# EAGLE board ATTiny Fuse Reset with 12V Charge Pump_2271-94sa_2472-29sa (EAGLE 6.0)
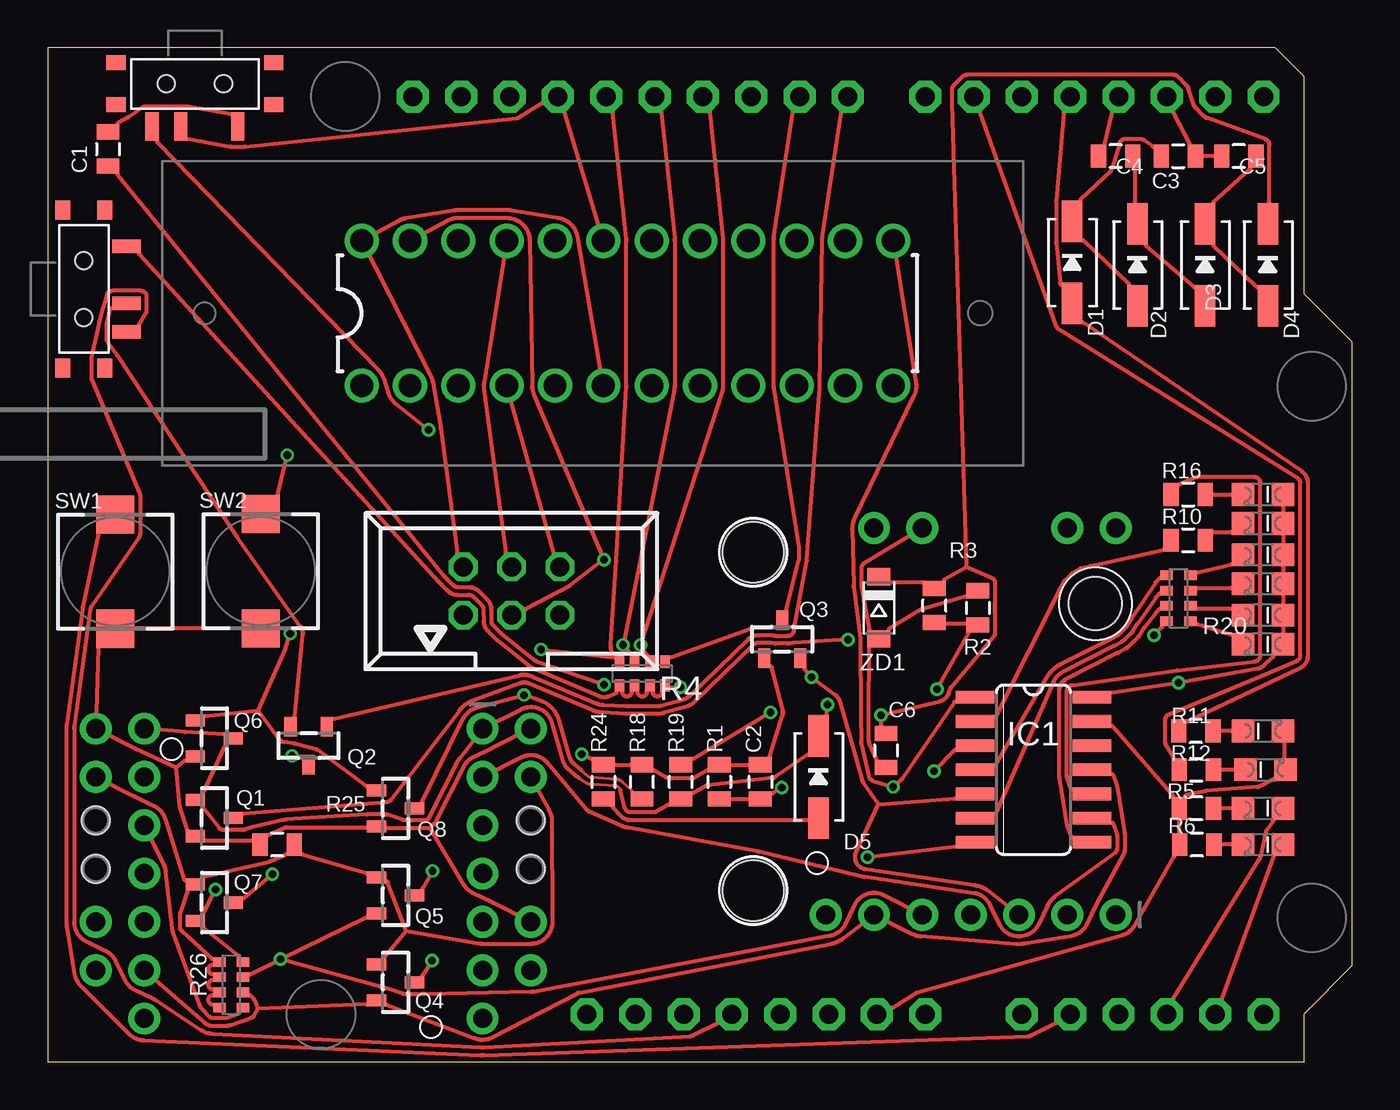
[diagram p0: board, top side]
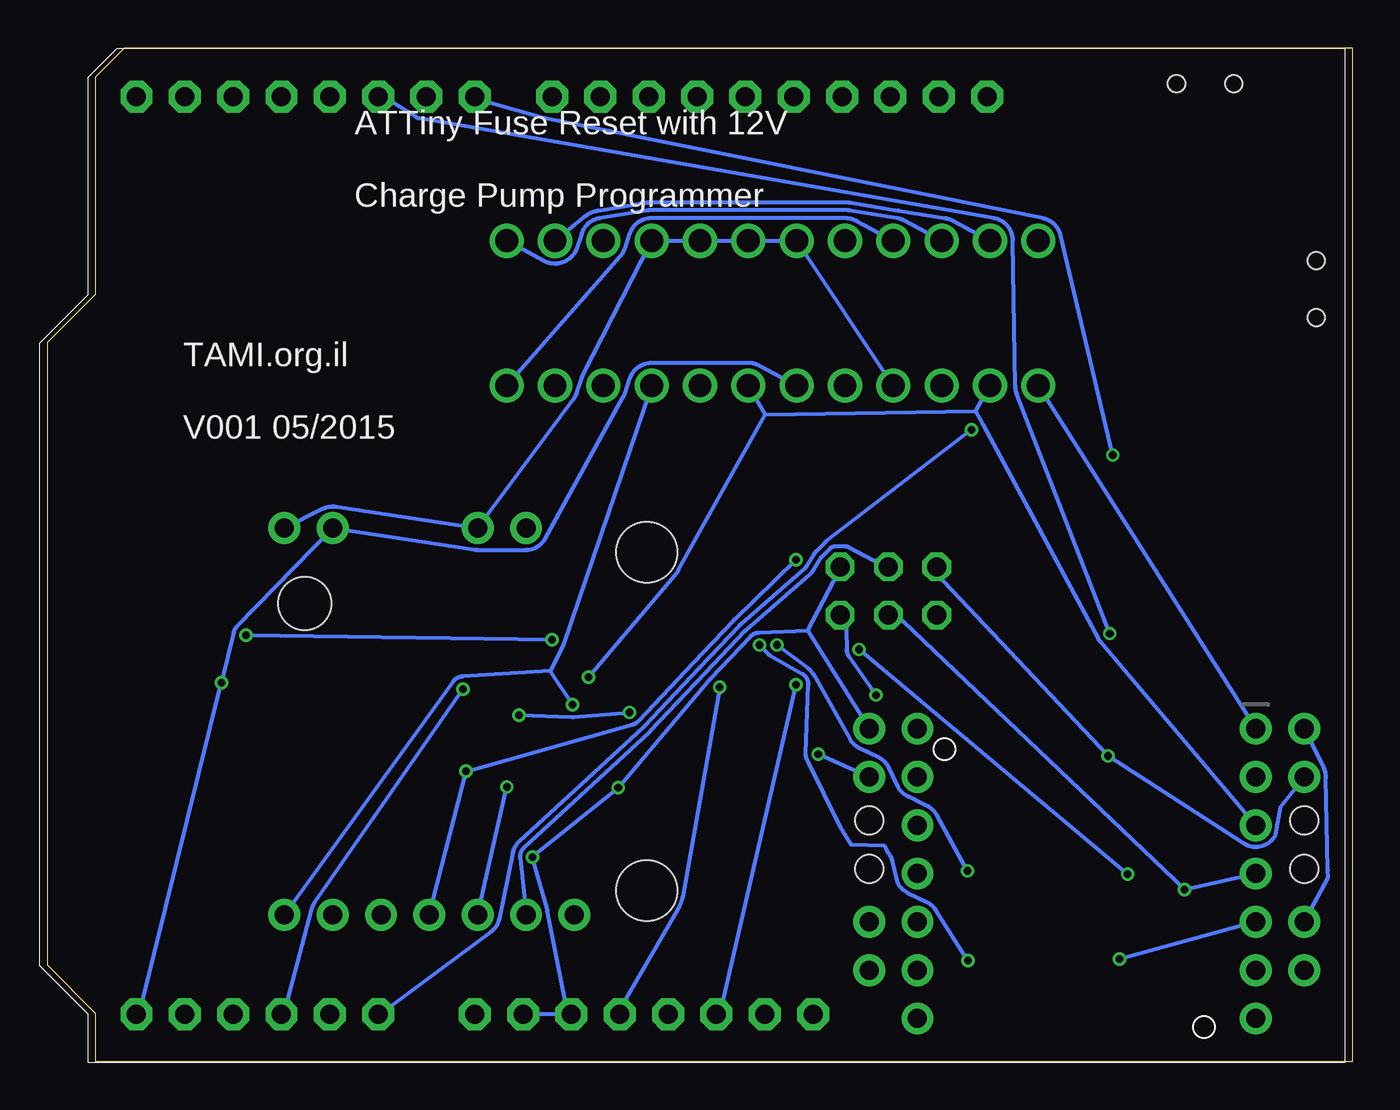
[diagram p1: board, bottom side, seen from below]

Size 68.58 x 53.34 mm. Coordinates in mm from the lower left corner, seen from the top.
Outline: 0,53.34 0,0 66.04,0 66.04,2.54 68.58,5.08 68.58,37.85 66.04,40.39 66.04,51.82 64.52,53.34 0,53.34
Copper layers 1+16: TOP 0.035mm / dielectric 0.15mm / BOTTOM 0.035mm
Design rules: minimum track width 0.1524mm, track to track 0.1524mm, copper to edge 0.254mm, minimum pad ring 0.1mm, minimum via ring 0.1mm
Net classes: 0 default: width 0.152 mm, clearance 0.205 mm
tRestrict: area 34.8,24.4 to 39.4,29; area 35.1,7 to 39,11; area 1.6,11.7 to 3.5,13.7; area 1.6,9.2 to 3.4,11.1; area 24.4,11.6 to 26.4,13.7; area 24.4,9.1 to 26.4,11.2; area 53.2,22.2 to 57,26
vRestrict: area 34.8,24.4 to 39.4,29; area 35.1,7 to 39,11; area 1.6,11.7 to 3.5,13.7; area 1.6,9.2 to 3.4,11.1; area 24.4,11.6 to 26.4,13.7; area 24.4,9.1 to 26.4,11.2; area 53.2,22.2 to 57,26

## Footprints (pad centres in the part's own frame; a part is rotated, then mirrored left to right if it is on the bottom)
BREAKOUT_TAMI_NOHOLES = drill 1 pad 1.676: 1.PB5 -10.16,-8.89; 2.PB4 -10.16,-6.35; 3.PB3 -10.16,-3.81; 4.PB2 -10.16,-1.27; 5.PB1 -10.16,1.27; 6.PB0 -10.16,3.81; 7.GND -10.16,6.35; 8.GND 10.16,-8.89; 9.VCC 10.16,-6.35; 10.GND 10.16,1.27; 11.BAT 10.16,3.81
BREAKOUT_ATTAMI = drill 1 pad 1.676: 1.PB5 1.27,1.27; 2.PB4 1.27,3.81; 3.PB3 1.27,6.35; 4.PB2 1.27,8.89; 5.PB1 1.27,11.43; 6.PB0 1.27,13.97; 7.GND 1.27,16.51; 8.GND 21.59,1.27; 9.VCC 21.59,3.81; 10.GND 21.59,11.43; 11.BAT 21.59,13.97 | hole 2.8: 17.628,2.337 | hole 3.2: 20.32,20.32; 2.54,20.32
0805 = smd 0.8 x 1.2: 1 -0.9,0; 2 0.9,0
SOD-323 = smd 2.184 x 1.067: AQ 2.159,0; CQ -2.159,0
LED-805 = smd 1.2 x 1.2: A 0,-1.05; C 0,1.05
SO14 = smd 0.66 x 2.032: 1 -3.81,-3.073; 2 -2.54,-3.073; 3 -1.27,-3.073; 4 0,-3.073; 5 1.27,-3.073; 6 2.54,-3.073; 7 3.81,-3.073; 8 3.81,3.073; 9 2.54,3.073; 10 1.27,3.073; 11 0,3.073; 12 -1.27,3.073; 13 -2.54,3.073; 14 -3.81,3.073
1X02_PP_HOLES_ONLY = drill 0.889 pad 1.397: 1 0,0; 2 2.54,0 | hole 1.473: 2.54,0; 0,0
SOT23-R = smd 0.635 x 1.016: 1 -0.95,-1; 2 0.95,-1; 3 0,1
0603-ARV = smd 0.5 x 0.65: 1 -1.2,-0.625; 2 -0.4,-0.625; 3 0.4,-0.625; 4 1.2,-0.625; 5 1.2,0.625; 6 0.4,0.625; 7 -0.4,0.625; 8 -1.2,0.625
PUSHBUTTON_SMD_SJ = smd 2 x 2: P$1 3,0; P$2 -3,0
KPS-1290 = smd 0.7 x 1.5: O -2.25,2.25; P 0.75,2.25; S 2.25,2.25 | smd 1 x 0.8: P$1 -4.15,1.1; P$2 -4.15,-1.1; P$3 4.15,-1.1; P$4 4.15,1.1 | hole 0.9: 1.5,0; -1.5,0
ARDUINOR3-BPLACE = drill 1 pad 1.676 octagon: 3V 35.56,2.54; 5V 38.1,2.54; A0 50.8,2.54; A1 53.34,2.54; A2 55.88,2.54; A3 58.42,2.54; A4 60.96,2.54; A5 63.5,2.54; AREF 23.876,50.8; D0 63.5,50.8; D1 60.96,50.8; D2 58.42,50.8; D3 55.88,50.8; D4 53.34,50.8; D5 50.8,50.8; D6 48.26,50.8; D7 45.72,50.8; D8 41.656,50.8; D9 39.116,50.8; D10 36.576,50.8; D11 34.036,50.8; D12 31.496,50.8; D13 28.956,50.8; GND 26.416,50.8; GND1 43.18,2.54; GND2 40.64,2.54; IOREF 30.48,2.54; RESERVED 27.94,2.54; RESET 33.02,2.54; SCL 18.796,50.8; SDA 21.336,50.8; VIN 45.72,2.54
DIL-24-ZIF = drill 1.2 pad 1.8: P$1 -13.97,-3.81; P$2 -11.43,-3.81; P$3 -8.89,-3.81; P$4 -6.35,-3.81; P$5 -3.81,-3.81; P$6 -1.27,-3.81; P$7 1.27,-3.81; P$8 3.81,-3.81; P$9 6.35,-3.81; P$10 8.89,-3.81; P$11 11.43,-3.81; P$12 13.97,-3.81; P$13 13.97,3.81; P$14 11.43,3.81; P$15 8.89,3.81; P$16 6.35,3.81; P$17 3.81,3.81; P$18 1.27,3.81; P$19 -1.27,3.81; P$20 -3.81,3.81; P$21 -6.35,3.81; P$22 -8.89,3.81; P$23 -11.43,3.81; P$24 -13.97,3.81
057-006-1 = drill 1 pad 1.508 octagon: 1 -2.54,-1.27; 2 -2.54,1.27; 3 0,-1.27; 4 0,1.27; 5 2.54,-1.27; 6 2.54,1.27
SOD-123 = smd 0.91 x 1.22: A 1.635,0; C -1.635,0

## Placement (x,y rotation side)
A1  [BREAKOUT_TAMI_NOHOLES]  12.7,8.64 180 top
A2  [BREAKOUT_ATTAMI]  57.4,6.48 90 top
A3  [BREAKOUT_TAMI_NOHOLES]  15.24,8.64 180 bottom
C1  [0805]  3.17,48.01 270 top
C2  [0805]  37.47,14.73 270 top
C3  [0805]  59.44,47.62 0 top
C4  [0805]  56.13,47.62 180 top
C5  [0805]  62.61,47.62 180 top
C6  [0805]  44.07,16.38 270 top
D1  [SOD-323]  53.85,42.04 270 top
D2  [SOD-323]  57.28,41.91 270 top
D3  [SOD-323]  60.83,41.91 270 top
D4  1N4148  [SOD-323]  64.14,41.91 270 top
D5  [SOD-323]  40.51,14.99 270 top
HBEAT  H.B.  [LED-805]  64.01,15.37 270 top
HV_O  HV  [LED-805]  63.88,17.4 270 top
IC1  [SO14]  51.82,15.37 270 top
ISP  PMD  [LED-805]  63.88,13.34 90 top
ISP_ERR  ERR  [LED-805]  63.88,11.43 90 top
JP1  [1X02_PP_HOLES_ONLY]  25.4,10.16 90 top
JP2  [1X02_PP_HOLES_ONLY]  2.54,10.16 90 top
PB0  PB0  [LED-805]  63.88,29.84 90 top
PB1  PB1  [LED-805]  63.88,28.32 90 top
PB2  PB2  [LED-805]  63.88,26.67 90 top
PB3  PB3  [LED-805]  63.88,25.15 90 top
PB4  PB4  [LED-805]  63.88,23.5 90 top
PB5  PB5  [LED-805]  63.88,21.97 90 top
Q1  [SOT23-R]  8.76,12.83 270 top
Q2  [SOT23-R]  13.72,16.64 180 top
Q3  [SOT23-R]  38.61,22.23 0 top
Q4  [SOT23-R]  18.29,4.19 270 top
Q5  [SOT23-R]  18.29,8.76 270 top
Q6  [SOT23-R]  8.76,17.02 270 top
Q7  [SOT23-R]  8.76,8.38 270 top
Q8  [SOT23-R]  18.29,13.34 270 top
R1  [0805]  35.31,14.73 270 top
R2  [0805]  48.9,23.88 270 top
R3  [0805]  46.61,24 90 top
R4  [0603-ARV]  31.25,20.42 180 top
R5  [0805]  60.38,13.34 180 top
R6  [0805]  60.4,11.43 180 top
R10  [0805]  59.94,27.43 0 top
R11  [0805]  60.35,17.4 180 top
R12  [0805]  60.38,15.37 0 top
R16  [0805]  59.94,29.84 0 top
R18  [0805]  31.24,14.73 90 top
R19  [0805]  33.27,14.73 90 top
R20  [0603-ARV]  59.44,24.38 90 top
R24  [0805]  29.21,14.73 270 top
R25  [0805]  12.06,11.43 180 top
R26  [0603-ARV]  9.65,4.06 90 top
SW1  [PUSHBUTTON_SMD_SJ]  3.56,25.78 270 top
SW2  [PUSHBUTTON_SMD_SJ]  11.2,25.81 270 top
SW3  [KPS-1290]  7.75,51.44 180 top
SW4  SWITCH_SPDT  [KPS-1290]  1.91,40.64 270 top
U1  [ARDUINOR3-BPLACE]  0.41,-0.03 0 top
U$2  [DIL-24-ZIF]  30.48,39.37 0 top
X1  [057-006-1]  24.38,24.77 0 top
ZD1  [SOD-123]  43.69,23.88 270 top

## Library data of the parts
A1-A3 C1-C6 D1-D5 HBEAT HV_O ISP ISP_ERR PB0 PB1-PB5 R1-R3 R5 R6 R10-R12 R16 R18 R19 R24 R25 U1 = ATtami
IC1 = 74xx-eu
JP1 JP2 = SparkFun-Connectors
Q1-Q8 SW1 SW2 = microbuilder
R4 R20 R26 = SparkFun-Passives
SW3 SW4 = SparkFun-Electromechanical
U$2 = ATTiny Fuse Reset with 12V Charge Pump
X1 = con-panduit; OC_FARNELL: unknown; OC_NEWARK: unknown
ZD1 = dp_devices

## Nets
11.5V: C6.1 D4.CQ R3.2 R19.2 ZD1.C
ATTINY_VCC: A1.9.VCC A2.9.VCC A3.9.VCC C2.1 IC1.14 PB0.A PB1.A PB2.A PB3.A PB4.A PB5.A Q2.3 Q3.1 Q4.1 Q5.1 Q7.1 R1.1 R18.2 R24.1 R25.1 R26.5 R26.6 R26.7 R26.8 U1.A5 U$2.P$6 U$2.P$24 X1.2
GND: A1.8.GND A1.10.GND A2.8.GND A2.10.GND A3.8.GND A3.10.GND C2.2 C6.2 HBEAT.C HV_O.C IC1.7 IC1.13 Q1.2 Q6.2 Q8.2 R1.2 R2.1 R5.2 R6.2 R25.2 SW1.P$1 SW2.P$1 SW3.P U1.GND U1.GND1 U1.GND2 U$2.P$4 U$2.P$16 U$2.P$17 U$2.P$18 U$2.P$19 X1.6 ZD1.A
HV/RESET: A1.1.PB5 A2.1.PB5 A3.1.PB5 D5.CQ Q1.1 Q6.3 R19.1 U$2.P$1 U$2.P$9
HV_OFF(RESET): Q6.1 Q8.1 U1.D5
HV_SENSE: R2.2 R3.1 U1.A2
ISP_RESET: Q8.3 R18.1 X1.5
N$1: Q2.2 SW4.P
N$2: Q3.3 R4.1 U1.D9
N$3: SW3.S U1.A0
N$4: HV_O.A R11.1
N$5: D5.AQ R24.2
N$6: ISP.C R5.1
N$7: A1.2.PB4 IC1.9
N$8: Q4.3 R4.2 U1.D11
N$9: SW1.P$2 U1.A1
N$10: C3.1 D1.CQ D2.AQ
N$11: C4.1 D2.CQ D3.AQ
N$12: C5.1 D3.CQ D4.AQ
N$13: IC1.10 R16.1
N$14: C1.1 SW3.O
N$15: ISP_ERR.C R6.1
N$16: SW4.S U1.3V
N$17: ISP_ERR.A U1.A4
N$18: ISP.A U1.A3
N$19: R12.1 U1.D6
N$20: HBEAT.A R12.2
N$21: IC1.2 R10.1
N$22: SW2.P$2 U1.D7
N$23: PB2.C R20.4
N$24: IC1.4 R20.5
N$25: PB1.C R10.2
N$26: IC1.6 R20.6
N$27: PB0.C R16.2
N$28: IC1.8 R20.7
N$29: PB3.C R20.3
N$30: PB4.C R20.2
N$31: PB5.C R20.1
N$32: Q1.3 R20.8
N$33: C1.2 U1.RESET
N$34: Q7.3 R4.4 U1.D13
N$36: X1.1
N$37: Q5.3 R4.3 U1.D12
P1: C3.2 C5.2 U1.D2
P2: C4.2 U1.D3
PUMP_VCC: D1.AQ R11.2 U1.D4
SCI: A2.3.PB3 A3.3.PB3 IC1.5 Q3.2 R26.1 U$2.P$2 U$2.P$7
SDI_MOSI: A2.6.PB0 A3.6.PB0 IC1.11 Q4.2 R26.2 U$2.P$12 U$2.P$21 X1.4
SDO-SCK: A2.4.PB2 A3.4.PB2 IC1.3 Q7.2 R26.4 U$2.P$14 U$2.P$23 X1.3
SII-MISO: A2.5.PB1 A3.5.PB1 IC1.1 Q5.2 R26.3 U$2.P$13 U$2.P$22
VCC: R4.5 R4.6 R4.7 R4.8 SW4.O U1.5V
VCC_OFF: Q2.1 U1.D8
VIN: U1.VIN

## Tracks (layer width: path | path; a pad name or v marks a point on that pad's centre or on a via)
11.5V  (via drill 0.4 pad 0.7)
  TOP 0.203: 48.3,26.04 47.16,25.39 arc60 47.11,25.3 47.11,25.2 R3.2 46.11,25.2 46.01,25.2 44.3,25.2 44.2,25.2 ZD1.C | C6.1 43.8,17.58 43.8,17.68 v43.8,18.24 46.9,18.97 arc58 47.37,19.4 47.44,19.61 arc-21 47.49,19.7 49.73,22.38 arc40 49.8,22.58 49.8,25.18 arc66 49.62,25.46 48.3,26.04 | D4.CQ 64.22,45.06 64.22,45.16 64.22,48.23 arc70 64.02,48.51 60.92,49.64 arc-25 60.8,49.71 60.31,50.2 arc-27 60.24,50.33 59.96,51.21 arc27 59.88,51.33 59.39,51.82 arc45 59.17,51.91 48.32,51.91 arc45 48.1,51.82 47.61,51.33 arc45 47.52,51.11 47.52,50.42 47.52,50.41 48.3,26.04 | v37.99,18.38 33.93,15.95 arc-31 33.87,15.93 33.77,15.93 R19.2
  BOTTOM 0.203: v43.8,18.24 41.02,18.13 arc-7 40.94,18.14 v37.99,18.38
ATTINY_VCC  (via drill 0.4 pad 0.7)
  TOP 0.203: IC1.14 55.8,19.41 55.91,19.41 arc9 55.92,19.41 v59.45,19.94 63.56,20.67 arc33 63.92,20.85 64.4,21.3 arc47 64.43,21.37 64.43,21.47 PB5.A 64.93,22.47 64.93,22.57 64.93,22.89 64.93,23 PB4.A 64.93,23.99 64.93,24.09 64.93,24.55 64.93,24.65 PB3.A 64.93,25.64 64.93,25.75 64.93,26.07 64.93,26.17 PB2.A 64.93,27.17 64.93,27.27 64.93,27.72 64.93,27.82 PB1.A 64.93,28.82 64.93,28.92 64.93,29.25 64.93,29.35 PB0.A | R26.8 8.8,3.01 8.7,3.01 arc-180 8.7,3.52 8.8,3.52 R26.7 8.8,3.81 8.7,3.81 arc-180 8.7,4.32 8.8,4.32 R26.6 8.8,4.61 8.7,4.61 arc-180 8.7,5.12 8.8,5.12 R26.5 8.8,5.41 8.7,5.41 arc-42 8.63,5.44 7.05,6.89 arc-48 6.95,7.11 6.95,7.75 arc-19 6.96,7.85 7.35,8.98 arc19 7.36,9.01 7.36,9.12 Q7.1 | Q7.1 8.17,9.55 8.17,9.65 arc-77 8.25,9.75 11.63,10.53 arc11 11.69,10.55 12.52,10.92 arc-24 12.56,10.93 12.67,10.93 R25.1 13.26,10.93 13.37,10.93 arc-17 13.39,10.93 16.75,9.93 arc17 16.78,9.93 16.88,9.93 Q5.1 17.69,9.5 17.8,9.5 arc-70 17.89,9.43 18.84,6.88 | Q2.3 13.5,16.04 13.4,16.04 13.39,16.04 v12.85,16.09 | Q4.1 17.69,5.36 17.69,5.46 arc-40 17.72,5.52 18.84,6.88 | X1.2 21.53,26.69 21.53,26.79 20.66,33.33 arc2 20.66,33.35 20.24,35.77 arc17 20.12,36.11 U$2.P$24 18.48,44.24 arc-19 18.86,44.37 21.33,44.77 arc-9 21.59,44.8 24.13,44.8 arc-9 24.39,44.77 26.86,44.37 arc-71 27.86,43.38 U$2.P$6 | v28.08,16.19 28.56,15.94 arc27 28.61,15.93 28.71,15.93 R24.1 29.71,15.63 29.81,15.63 30.64,15.63 30.74,15.63 R18.2 31.74,15.33 31.84,15.33 arc-29 31.89,15.32 32.52,14.96 arc29 32.67,14.93 33.87,14.93 arc29 34.02,14.96 34.66,15.32 arc-29 34.71,15.33 34.81,15.33 R1.1 35.8,15.63 35.91,15.63 36.87,15.63 36.97,15.63 C2.1 37.96,15.93 37.96,16.03 arc-17 37.97,16.06 38.62,18.19 arc31 38.63,18.54 38.07,20.74 arc76 37.98,20.82 37.87,20.82 Q3.1
  TOP 0.203: 18.84,6.88 22.67,6.24 arc9 22.86,6.22 25.4,6.22 arc90 26.55,7.37 26.52,12.85 arc22 26.51,12.89 26.44,13.07 | 26.44,13.07 | 26.44,13.07 26.35,13.27 arc7 26.35,13.28 A3.9.VCC | A1.9.VCC 4.57,13.96 arc1 4.58,13.96 5.58,13.48 arc-47 6.17,12.79 7.16,9.62 arc73 7.25,9.55 7.36,9.55 Q7.1
  BOTTOM 0.203: v28.08,16.19 A3.9.VCC | A1.9.VCC 3.78,13.41 4.04,11.96 arc97 5.7,11.48 v12.85,16.09 21.51,25.3 21.59,25.37 X1.2 | U1.A5 63.56,3.24 63.56,3.34 v59.45,19.94 58.8,22.6 arc31 58.63,22.9 A2.9.VCC 46.15,26.93 arc-9 45.97,26.92 43.43,26.92 arc-61 42.43,27.52 38.31,34.98 arc-11 38.23,35.18 37.98,35.94 arc72 36.83,36.77 31.75,36.77 arc28 31.18,36.62 U$2.P$6
GND  (via drill 0.4 pad 0.7)
  TOP 0.203: 6.75,15.5 6.95,13.43 arc13 6.96,13.36 7.35,12.23 arc-19 7.36,12.19 7.36,12.09 Q1.2 8.17,11.66 8.27,11.66 10.77,11.66 10.87,11.66 R25.2 11.46,11.93 11.56,11.93 arc24 11.61,11.94 12.44,12.31 arc-24 12.56,12.34 16.78,12.34 16.88,12.34 Q8.2 17.69,12.3 17.8,12.3 19.8,12.3 arc3 19.84,12.3 20.09,12.32 | 6.75,15.5 4.6,16.48 arc-2 4.56,16.5 A1.8.GND 2.66,21.78 2.66,21.88 SW1.P$1 4.45,22.79 4.56,22.79 10.2,22.79 10.3,22.79 SW2.P$1 | A3.8.GND 23.38,16.5 arc-1 23.36,16.49 22.36,16.02 arc38 21.84,15.5 20.44,12.7 arc-21 20.28,12.49 20.09,12.32 | R1.2 35.8,13.83 35.91,13.83 36.87,13.83 36.97,13.83 C2.2 37.96,14.13 38.06,14.13 arc30 38.12,14.14 v38.59,14.42 | A3.10.GND 23.37,8.39 arc1 23.36,8.39 22.36,8.88 arc-33 21.88,9.32 20.09,12.32 | HV_O.C 65,16.9 65,16.8 65,15.97 65,15.87 HBEAT.C 64.56,14.87 64.46,14.87 arc27 64.41,14.86 63.7,14.49 arc-22 63.58,14.46 60.85,14.24 arc7 60.81,14.24 59.85,14.03 arc78 59.77,13.94 59.77,13.83 R5.2 | R5.2 59.49,12.84 59.49,12.73 59.49,12.03 59.49,11.93 R6.2 59.2,10.93 59.2,10.83 arc-30 59.19,10.78 57.13,7.18 arc-45 56.44,6.64 45.7,3.64 arc17 45.62,3.6 44.42,2.85 44.32,2.85 U1.GND1 | X1.6 26.61,26.69 26.61,26.79 U$2.P$4 | U$2.P$19 27.17,49.93 27.17,50.03 U1.GND 26.09,50.42 25.98,50.42 24.79,49.67 arc-26 24.66,49.62 10.38,48.13 arc-6 10.35,48.13 9.65,48.13 arc-10 9.59,48.13 7.37,48.53 arc10 7.35,48.54 7.25,48.54 SW3.P | IC1.13 55.8,17.68 55.91,17.68 arc-49 55.98,17.64 59.15,14 arc-41 59.18,13.94 59.18,13.83 R5.2 | 6.75,15.5 7.19,15.83 arc-37 7.25,15.85 7.36,15.85 Q6.2 | C6.2 43.57,15.78 43.57,15.88 arc24 43.56,15.93 43.19,16.76 arc-24 43.16,16.88 43.15,18.23 arc-1 43.15,18.24 43.18,21.79 43.18,21.89 ZD1.A
  TOP 0.203: v43.09,10.78 47.72,11.33 arc-7 47.73,11.33 47.83,11.33 IC1.7 | A2.10.GND 42.92,26.23 arc59 42.77,25.97 42.77,25.06 arc10 42.78,25 43.18,22.71 arc-10 43.18,22.7 43.18,22.59 ZD1.A | R2.1 48.4,24.48 48.3,24.48 arc16 48.27,24.47 45.92,23.8 arc15 45.85,23.77 44.24,22.78 arc58 44.2,22.7 44.2,22.59 ZD1.A
  BOTTOM 0.203: A1.10.GND 1.27,9.7 1.29,10.09 1.4,14.96 arc-28 1.52,15.5 A1.8.GND | 28.64,22.68 27.26,25.29 27.25,25.3 27.18,25.37 X1.6 | 28.64,22.68 31.18,22.58 arc-44 31.63,22.38 33.73,20.15 arc-3 33.76,20.13 v38.59,14.42 v43.09,10.78 42.33,8.06 arc4 42.31,7.97 41.39,3.34 41.39,3.24 U1.GND2 41.78,2.5 41.88,2.5 42.75,2.5 42.85,2.5 U1.GND1 | U$2.P$4 U$2.P$19 U$2.P$18 U$2.P$17 U$2.P$16 40.44,36.11 arc-9 40.51,35.94 40.77,35.18 arc18 40.94,34.84 A2.10.GND 53.42,29.2 arc-35 54.11,29.09 A2.8.GND | A3.8.GND 28.64,22.68
HV/RESET  (via drill 0.4 pad 0.7)
  TOP 0.152: 30.11,14.29 30.04,14.39 arc51 29.83,14.51 28.57,14.59 arc-32 28.23,14.71 27.94,14.93
  TOP 0.203: 27.94,14.93 27.8,15.03 arc-6 27.77,15.05 27.38,15.38 arc-34 27.05,15.9 26.5,17.84 arc101 24.88,18.55 A1.1.PB5 21.63,15.94 arc11 21.47,15.68 20.07,12.88 arc-63 19.8,12.71 18.78,12.71 arc-19 18.68,12.73 17.89,12.99 arc19 17.8,13.01 16.78,13.01 arc4 16.76,13.01 12.52,12.74 arc10 12.4,12.73 10.7,12.33 arc6 10.66,12.32 10.37,12.22 arc-19 10.27,12.2 9.26,12.2 arc-53 9.01,12.32 8.19,13.4 arc-37 8.17,13.46 8.17,13.56 Q1.1 8.17,13.99 8.17,14.1 arc-25 8.18,14.14 9.35,16.66 arc25 9.36,16.7 9.36,16.8 Q6.3 9.36,17.23 9.26,17.23 9.25,17.23 7.24,17.34 7.23,17.34 A3.1.PB5 | v40.99,18.79 40.95,18.25 40.95,18.24 40.95,18.14 D5.CQ 40.08,16.15 39.98,16.15 arc35 39.92,16.14 38.24,14.98 arc-28 38.1,14.93 34.67,14.54 arc23 34.55,14.5 33.92,14.14 arc-29 33.87,14.13 33.77,14.13 R19.1 32.78,13.53 32.67,13.53 arc29 32.62,13.52 31.99,13.16 arc-29 31.84,13.12 30.64,13.12 arc-76 30.34,13.36 30.11,14.29
  BOTTOM 0.203: U$2.P$9 41.45,21.99 arc8 41.48,21.91 42.16,20.55 | v40.99,18.79 42.16,20.55 | 42.16,20.55 46.78,20.27 arc-51 47.28,20 A2.1.PB5 | U$2.P$1 A3.1.PB5
HV_OFF(RESET)  (via drill 0.4 pad 0.7)
  TOP 0.203: Q8.1 16.88,14.5 16.78,14.5 arc-37 16.72,14.52 14.22,16.39 arc22 14.11,16.44 13.01,16.73 arc6 12.94,16.74 12.4,16.82 arc-45 12.2,16.95 11.07,18.49 | 11.07,18.49 12.48,21.68 arc6 12.49,21.71 v12.76,22.53 | Q6.1 8.17,18.18 8.27,18.18 arc6 8.28,18.18 11.07,18.49
  BOTTOM 0.203: v12.76,22.53 17.64,35.12 arc20 17.72,35.54 17.84,43.2 arc-79 18.84,44.37 49.07,49.62 arc22 49.18,49.67 50.37,50.42 50.47,50.42 U1.D5
HV_SENSE  (via drill 0.4 pad 0.7)
  TOP 0.203: v46.74,19.61 48.38,22.53 arc29 48.4,22.58 48.4,22.68 R2.2 48.4,23.04 48.3,23.04 47.21,23.04 47.11,23.04 R3.1
  BOTTOM 0.203: U1.A2 55.94,3.24 55.94,3.34 54.7,8.04 arc20 54.53,8.4 v46.74,19.61
ISP_RESET  (via drill 0.4 pad 0.7)
  TOP 0.152: R18.1 30.72,14.16 30.72,14.23 arc47 30.69,14.29 30.24,14.7 arc39 29.85,14.87 28.59,14.95 arc-37 28.43,15.02 28.03,15.36
  TOP 0.203: 28.03,15.36 27.65,15.69 arc-34 27.45,16.01 26.89,17.95 arc55 25.91,18.99 v25.04,19.3 22.56,18.63 arc49 21.83,18.03 19.7,13.7 arc26 19.69,13.65 19.69,13.55 Q8.3
  BOTTOM 0.203: X1.5 26.61,22.84 26.61,22.74 26.58,21.67 arc-34 26.46,21.31 v25.04,19.3
N$1
  TOP 0.203: Q2.2 12.98,18.04 12.98,18.14 arc-6 12.98,18.16 13.41,22.46 arc41 13.29,22.91 9.95,27.63 9.95,27.64 3.66,37.16 arc2 3.65,37.17 3.15,37.86 arc-36 3.1,38.04 3.1,38.74 arc-15 3.11,38.82 3.31,39.57 arc-75 3.4,39.64 3.51,39.64 SW4.P
N$2
  TOP 0.203: U1.D9 39.18,50.03 39.18,49.93 38.18,43.36 arc9 38.16,43.18 38.16,35.56 arc9 38.18,35.37 39.49,27.05 arc-9 39.49,27.04 39.49,26.43 arc-14 39.49,26.41 38.83,23.76 arc14 38.82,23.73 38.82,23.63 Q3.3 38.39,22.86 38.29,22.86 37.34,22.86 arc20 36.96,22.79 32.74,21.28 arc-20 32.7,21.27 32.6,21.27 R4.1
N$3  (via drill 0.4 pad 0.7)
  TOP 0.203: SW3.S 5.75,48.54 5.75,48.44 arc44 5.77,48.36 17.38,36.4 arc-26 17.66,35.94 17.9,35.19 arc33 18.3,34.62 v20.01,33.24
  BOTTOM 0.203: v20.01,33.24 27.67,27.36 arc-7 27.74,27.3 28.18,26.85 arc-14 28.29,26.72 28.68,26.07 arc18 28.81,25.92 32.12,23.04 arc-6 32.23,22.94 34.33,20.72 34.33,20.71 37.22,17.65 arc4 37.27,17.6 43.82,11.56 arc-36 44.14,10.99 44.85,7.52 arc42 45.29,6.83 50.48,2.96 50.55,2.89 U1.A0
N$4
  TOP 0.203: HV_O.A 62.33,17.4 62.23,17.4 61.65,17.4 61.55,17.4 R11.1
N$5
  TOP 0.203: D5.AQ 40.08,12.72 39.98,12.72 30.64,12.72 arc-48 30.11,12.95 29.73,13.36 arc-42 29.71,13.43 29.71,13.53 R24.2
N$6
  TOP 0.203: ISP.C 62.33,13.34 62.23,13.34 61.68,13.34 61.57,13.34 R5.1
N$7
  TOP 0.203: IC1.9 55.8,12.6 55.91,12.6 arc-70 56,12.53 56.19,11.99 arc-20 56.21,11.89 56.21,11.23 arc-54 56.09,10.98 52.92,8.67 arc28 52.56,8.24 52.09,7.25 arc-129 50.02,7.25 49.55,8.24 arc56 48.68,8.88 42.94,9.72 arc-5 42.84,9.74 37.34,11.07 37.33,11.08 30.44,12.33 arc-13 30.19,12.4 28.49,13.15 arc-26 28.38,13.23 26.28,15.72 arc77 24.88,16.01 A1.2.PB4
N$8  (via drill 0.4 pad 0.7)
  TOP 0.203: R4.2 31.5,21.27 31.5,21.37 arc34 31.49,21.43 v31.16,21.93 35.44,35.19 arc18 35.49,35.56 35.5,43.18 arc6 35.49,43.31 34.79,49.93 34.79,50.03 U1.D11 | Q4.3 19.69,4.41 19.69,4.51 arc-33 19.71,4.56 v20.21,5.33
  BOTTOM 0.203: v20.21,5.33 21.89,7.98 arc-32 22.36,8.39 23.36,8.88 arc39 23.89,9.41 24.18,10.62 24.24,10.76 24.43,11.04 24.59,11.35 26.34,11.43 26.69,11.97 26.91,12.36 28.63,15.84 arc35 28.73,16.21 28.59,19.82 arc-63 28.92,20.41 30.58,21.35 arc17 30.73,21.47 v31.16,21.93
N$9
  TOP 0.203: SW1.P$2 2.66,27.88 2.66,27.78 arc-12 2.65,27.76 1.85,23.93 arc4 1.85,23.88 1,17.74 arc8 0.99,17.53 0.99,7.37 arc9 1.01,7.11 1.41,4.64 arc36 1.73,4.02 4.27,1.48 arc42 5.03,1.14 22.77,0.36 arc5 22.93,0.36 51.56,1.36 arc24 51.69,1.39 53.02,2.05 53.09,2.12 U1.A1
N$10
  TOP 0.203: D2.AQ 56.84,40.74 56.84,40.84 arc46 56.81,40.92 54.45,43.18 arc44 54.38,43.2 54.28,43.2 D1.CQ 54.28,45.19 54.28,45.29 arc-47 54.31,45.36 55.84,46.8 arc30 55.93,46.94 56.34,48.31 arc-73 56.63,48.53 57.43,48.53 arc-36 57.61,48.48 58.08,48.14 arc36 58.14,48.12 58.24,48.12 C3.1
N$11
  TOP 0.203: D3.AQ 60.4,40.74 60.3,40.74 arc-41 60.23,40.77 57.74,42.9 arc-49 57.71,42.98 57.71,43.08 D2.CQ 57.16,45.06 57.16,45.16 57.16,47.02 57.16,47.13 C4.1
N$12
  TOP 0.203: D4.AQ 63.7,40.74 63.6,40.74 arc-44 63.53,40.77 61.3,42.9 arc-46 61.27,42.98 61.27,43.08 D3.CQ 61.27,45.06 61.27,45.16 arc-48 61.3,45.24 63.18,46.95 arc48 63.21,47.02 63.21,47.13 C5.1
N$13
  TOP 0.203: IC1.10 53.98,14.33 53.87,14.33 arc-70 53.78,14.39 53.58,14.93 arc-20 53.57,15.04 53.57,19.51 arc-82 53.83,19.81 59.35,20.59 arc-1 59.37,20.59 63.47,21.07 arc83 63.74,21.37 63.74,30.45 arc90 63.43,30.75 60.44,30.75 arc24 60.32,30.73 59.49,30.35 arc-24 59.44,30.34 59.34,30.34 R16.1
N$14
  TOP 0.203: SW3.O 9.75,49.83 9.65,49.83 arc-10 9.63,49.84 7.4,50.24 arc10 7.35,50.24 5.15,50.24 arc36 4.97,50.19 4.28,49.69 arc-8 4.24,49.66 3.73,49.4 arc62 3.67,49.31 3.67,49.2 C1.1
N$15
  TOP 0.203: ISP_ERR.C 62.33,11.43 62.23,11.43 61.7,11.43 61.6,11.43 R6.1
N$16
  TOP 0.203: SW4.S 4.8,38.64 4.8,38.74 arc-31 4.82,38.79 5.17,39.38 arc31 5.21,39.54 5.21,40.24 arc90 4.91,40.55 3.4,40.55 arc73 3.11,40.33 2.92,39.69 arc2 2.91,39.67 2.71,38.92 arc3 2.71,38.89 2.31,37.05 arc12 2.3,36.99 2.3,35.99 arc23 2.32,35.87 4.84,29.9 arc-23 4.86,29.78 4.86,27.78 arc-34 4.81,27.61 2.3,23.95 arc27 2.25,23.82 1.41,17.68 arc8 1.4,17.53 1.4,7.37 arc64 2.04,6.33 3.04,5.86 arc-39 3.57,5.32 4.05,4.33 arc39 4.58,3.79 5.58,3.32 arc-8 5.71,3.24 8.08,1.68 arc30 8.64,1.49 22.78,0.77 arc6 22.94,0.77 33.79,1.36 arc23 33.91,1.39 35.24,2.05 35.31,2.12 U1.3V
N$17
  TOP 0.203: ISP_ERR.A 64.43,10.93 64.43,10.83 arc-20 64.43,10.79 61.71,3.34 61.71,3.24 U1.A4
N$18
  TOP 0.203: ISP.A 64.43,12.84 64.43,12.73 arc-35 64.41,12.68 64.08,12.21 arc23 64.03,12.1 63.73,10.76 arc-19 63.69,10.67 59.17,3.34 59.17,3.24 U1.A3
N$19
  TOP 0.203: R12.1 59.18,15.87 59.18,15.97 arc31 59.16,16.02 58.79,16.64 arc-31 58.74,16.8 58.74,18 arc-67 58.93,18.28 63.86,20.33 63.87,20.34 65.65,21.09 arc67 65.84,21.37 65.84,30.45 arc58 65.69,30.71 53.15,38.52 arc-38 53.02,38.68 49.01,49.93 49.01,50.03 U1.D6
N$20
  TOP 0.203: HBEAT.A 62.46,15.37 62.36,15.37 61.68,15.37 61.57,15.37 R12.2
N$21
  TOP 0.203: IC1.2 49.66,18.14 49.76,18.14 arc63 49.85,18.19 53.22,24.87 53.22,24.88 53.47,25.31 arc-15 53.49,25.33 53.84,25.68 arc-15 53.86,25.7 53.88,25.71 | 53.88,25.71 | 53.88,25.71 54.3,25.95 arc-15 54.32,25.96 54.34,25.96 54.8,26.09 54.81,26.09 58.62,26.93 arc-12 58.64,26.93 58.75,26.93 R10.1
N$22  (via drill 0.4 pad 0.7)
  TOP 0.203: SW2.P$2 12.1,29.7 12.1,29.81 arc-13 12.1,29.83 v12.6,31.92
  BOTTOM 0.203: v12.6,31.92 15.34,43.46 arc-65 16.27,44.36 42.47,49.63 arc4 42.49,49.63 45.29,50.42 45.39,50.42 U1.D7
N$23
  TOP 0.203: R20.4 60.28,25.73 60.39,25.73 arc14 60.41,25.73 62.21,26.17 arc-14 62.23,26.17 62.33,26.17 PB2.C
N$24
  TOP 0.203: R20.5 58.59,25.44 58.49,25.44 arc47 58.41,25.4 58.26,25.24 arc10 58.23,25.2 56.93,23.26 arc2 56.91,23.22 56.69,22.87 arc-13 56.67,22.85 56.32,22.5 arc-15 56.3,22.48 56.28,22.47 | 56.28,22.47 | 56.28,22.47 56.23,22.44 | 56.23,22.44 | 56.23,22.44 55.87,22.23 55.86,22.23 53.18,20.88 arc33 52.55,20.28 49.85,15.65 arc-60 49.76,15.6 49.66,15.6 IC1.4
N$25
  TOP 0.203: R10.2 61.14,27.88 61.24,27.88 62.23,27.88 62.33,27.88 PB1.C
N$26
  TOP 0.203: R20.6 58.59,24.64 58.49,24.64 arc47 58.41,24.6 58.26,24.44 arc8 58.23,24.41 57.28,23.05 arc3 57.25,23 57.04,22.65 arc-13 56.96,22.56 56.61,22.21 arc-15 56.51,22.13 56.49,22.12 56.43,22.09 | 56.43,22.09 | 56.43,22.09 56.07,21.88 arc-3 56.05,21.86 53.37,20.51 arc40 52.84,19.96 49.85,13.12 arc-66 49.76,13.06 49.66,13.06 IC1.6
N$27
  TOP 0.203: R16.2 61.14,29.84 61.24,29.84 62.23,29.84 62.33,29.84 PB0.C
N$28
  TOP 0.203: R20.7 58.59,23.84 58.49,23.84 arc47 58.41,23.8 58.26,23.64 arc5 58.24,23.62 57.64,22.85 arc6 57.6,22.79 57.38,22.44 arc-13 57.25,22.27 56.9,21.92 arc-15 56.71,21.78 56.69,21.77 56.69,21.76 56.63,21.73 56.27,21.52 arc-3 56.23,21.5 53.55,20.15 arc63 53.16,19.51 53.16,15.04 arc9 53.17,14.92 53.57,12.45 arc10 53.58,12.39 53.78,11.85 arc70 53.87,11.79 53.98,11.79 IC1.8
N$29
  TOP 0.203: R20.3 60.28,24.93 60.39,24.93 62.23,24.93 62.33,24.93 PB3.C
N$30
  TOP 0.203: R20.2 60.28,23.84 60.39,23.84 62.23,23.84 62.33,23.84 PB4.C
N$31
  TOP 0.203: R20.1 60.28,23.04 60.39,23.04 arc-17 60.42,23.03 62.2,22.47 arc17 62.23,22.47 62.33,22.47 PB5.C
N$32  (via drill 0.4 pad 0.7)
  TOP 0.203: v42.07,22.2 39.22,22.04 arc6 39.19,22.04 39.05,22.01 arc-10 38.92,22 38.29,22 arc-10 38.17,22.01 38.03,22.04 arc10 37.98,22.04 37.34,22.04 arc44 37.13,21.95 34,18.94 arc-28 33.55,18.68 32.37,18.35 arc-16 32.05,18.3 30.45,18.3 arc-3 30.39,18.3 29.17,18.37 arc-20 28.68,18.48 25.3,19.9 arc43 24.81,19.91 22.32,18.98 arc32 21.63,18.47 18.04,13.78 arc-48 17.82,13.66 10.28,13.04 10.27,13.04 10.17,13.04 Q1.3 | R20.8 58.59,23.04 58.59,22.93 arc-44 58.56,22.86 v58.16,22.44
  BOTTOM 0.203: v58.16,22.44 v42.07,22.2
N$33  (via drill 0.4 pad 0.7)
  TOP 0.203: C1.2 3.67,46.81 3.67,46.71 arc39 3.7,46.64 20.85,25.53 arc6 20.87,25.51 20.98,25.4 | 20.98,25.4 | 20.98,25.4 21.3,25.08 21.32,25.06 arc44 21.53,24.97 22.17,24.96 arc-44 22.66,24.75 23.1,24.31 arc-44 23.31,23.82 23.32,23.18 arc44 23.41,22.97 23.52,22.86 | 23.52,22.86 | 23.52,22.86 23.84,22.54 23.86,22.52 arc6 23.88,22.5 25.51,21.18 arc20 25.71,21.07 v29.25,19.84
  BOTTOM 0.203: v29.25,19.84 33.08,3.34 33.08,3.24 U1.RESET
N$34  (via drill 0.4 pad 0.7)
  TOP 0.203: 29.9,21.27 R4.4 29.9,21.27 | 29.9,21.27 29.8,21.27 | 29.8,21.27 arc-78 29.7,21.35 29.61,21.79 arc-16 29.6,21.97 29.9,26.37 29.9,26.38 30.41,35.49 arc3 30.42,35.56 30.42,43.18 arc6 30.41,43.31 29.71,49.93 29.71,50.03 U1.D13 | v25.93,21.69 29.79,21.27 arc6 29.8,21.27 | 29.8,21.27 29.9,21.27 | Q7.3 10.17,8.6 10.27,8.6 arc40 10.34,8.62 v11.81,9.88
  BOTTOM 0.203: v11.81,9.88 v25.93,21.69
N$37  (via drill 0.4 pad 0.7)
  TOP 0.203: Q5.3 19.69,8.98 19.69,9.08 arc-30 19.71,9.13 v20.23,10.05 | U1.D12 32.25,50.03 32.25,49.93 32.95,43.31 arc-6 32.96,43.18 32.96,35.56 arc-11 32.93,35.32 v30.25,21.93 30.68,21.44 arc-41 30.7,21.37 30.7,21.27 R4.3
  BOTTOM 0.203: v20.23,10.05 21.86,13 arc-35 22.36,13.48 23.36,13.95 arc39 23.89,14.49 24.37,15.48 arc-39 24.91,16.02 25.89,16.49 arc35 26.4,16.96 28.32,20.37 arc-24 28.61,20.7 v30.25,21.93
P1
  TOP 0.203: U1.D2 59.17,50.03 59.17,49.93 60.03,48.27 arc-27 60.04,48.23 60.04,48.12 C3.2 60.63,47.62 60.74,47.62 61.31,47.62 61.41,47.62 C5.2
P2
  TOP 0.203: U1.D3 55.94,50.03 55.94,49.93 55.53,48.25 arc14 55.53,48.23 55.53,48.12 C4.2
PUMP_VCC
  TOP 0.203: R11.2 59.75,17.9 59.85,17.9 arc25 59.89,17.91 65.84,20.72 arc65 66.25,21.37 66.25,30.45 arc56 65.93,31.04 54.44,38.87 arc34 54.38,38.89 54.28,38.89 D1.AQ 53.42,40.87 53.31,40.87 arc-84 53.21,40.96 53.01,43.07 arc-6 53.01,43.1 53.01,45.29 arc-5 53.01,45.31 53.4,49.93 53.4,50.03 U1.D4
SCI  (via drill 0.4 pad 0.7)
  TOP 0.203: Q3.2 39.77,20.82 39.77,20.72 arc40 39.8,20.65 v40.15,20.23 41.38,19.32 arc-38 41.62,18.97 42.78,14.89 arc19 42.88,14.68 43.67,13.53 | 43.67,13.53 47.72,13.87 47.73,13.87 47.83,13.87 IC1.5 | A2.3.PB3 49.47,8.98 arc29 48.74,9.28 43,10.13 arc-107 42.5,11.06 43.67,13.53 | R26.1 10.05,2.72 10.05,2.61 arc-70 9.99,2.52 9.46,2.33 arc-20 9.35,2.31 8.7,2.31 arc-46 8.48,2.4 8.16,2.73 arc-24 7.99,3 6.58,6.87 arc-14 6.54,7.04 6.22,10.03 arc21 6.1,10.42 A3.3.PB3
  BOTTOM 0.203: 19.8,34.21 19.44,33.56 arc1 19.43,33.55 13.34,22.22 arc-12 13.26,22.1 A3.3.PB3 | U$2.P$7 30.85,34.05 | 30.85,34.05 35.42,25.87 arc11 35.63,25.57 v40.15,20.23 | 19.8,34.21 U$2.P$2 | 30.85,34.05 19.8,34.21
SDI_MOSI
  TOP 0.203: R26.2 10.5,3.52 10.6,3.52 arc-47 10.68,3.48 10.83,3.32 arc-22 10.89,3.22 11.05,2.81 | IC1.11 55.8,15.14 55.91,15.14 arc-70 56,15.07 56.19,14.53 arc-10 56.21,14.48 56.61,12 arc-9 56.62,11.89 56.62,11.23 arc-28 56.53,10.88 55.13,8.29 arc3 55.1,8.24 54.62,7.25 arc-55 53.78,6.62 51.31,6.21 arc-14 50.93,6.2 45.88,6.61 arc-22 45.46,6.72 A2.6.PB0 41.84,6.52 arc-27 41.19,6.22 27.94,3.64 arc16 27.86,3.61 23.37,1.3 arc-48 22.46,1.25 17.83,3.02 arc21 17.8,3.02 17.69,3.02 Q4.2 16.88,3.02 16.78,3.02 11.05,2.81 | U$2.P$21 22.94,35.75 arc17 22.93,35.4 24.07,26.79 24.07,26.69 X1.4 | A3.6.PB0 8.23,2.08 arc41 8.7,1.9 9.35,1.9 arc19 9.59,1.94 10.7,2.32 arc43 10.87,2.47 11.05,2.81
  BOTTOM 0.203: X1.4 25.04,26.35 25.14,26.35 26.47,27.06 arc-28 26.61,27.1 27.24,27.1 arc-45 27.45,27.01 27.89,26.56 arc-14 27.94,26.51 28.33,25.86 arc18 28.54,25.61 31.86,22.73 arc-6 31.93,22.66 34.03,20.43 36.92,17.37 arc4 36.99,17.3 43.54,11.26 arc-53 43.75,10.71 A2.6.PB0 | U$2.P$12 38.46,42.39 arc-23 38.23,42.8 37.98,43.56 arc72 36.83,44.39 29.21,44.39 26.67,44.38 arc28 26.1,44.24 U$2.P$21
SDO-SCK  (via drill 0.4 pad 0.7)
  TOP 0.203: R26.4 10.05,5.41 10.05,5.51 arc51 10.02,5.59 8.21,7.04 arc-51 8.17,7.11 8.17,7.22 Q7.2 8.17,7.65 8.17,7.75 arc-27 8.18,7.79 v8.82,9.06 | U$2.P$23 21.02,44.24 arc-28 21.59,44.39 24.13,44.39 arc-89 25.34,43.2 25.46,35.54 arc22 25.56,35.09 v29.24,26.42 27.42,25.04 arc-9 27.38,25.01 25.14,23.81 25.04,23.81 X1.3 | IC1.3 47.83,16.41 47.73,16.41 arc46 47.65,16.38 v46.59,15.29
  BOTTOM 0.203: U$2.P$14 40.4,44.43 arc30 39.63,44.77 37.16,45.18 arc9 36.83,45.2 29.21,45.2 26.67,45.2 arc9 26.35,45.18 23.87,44.77 21.4,44.37 arc19 21.02,44.24 U$2.P$23 | X1.3 23.73,23.18 23.63,23.18 v8.82,9.06 A3.4.PB2 | v29.24,26.42 32.47,23.27 arc-2 32.53,23.22 34.62,21 34.63,21 37.52,17.93 arc31 37.82,17.75 v46.59,15.29 A2.4.PB2
SII-MISO  (via drill 0.4 pad 0.7)
  TOP 0.203: Q5.2 16.88,7.6 16.78,7.6 arc26 16.74,7.59 v12.24,5.41 | R26.3 10.5,4.61 10.6,4.61 arc26 10.65,4.62 v12.24,5.41 | U$2.P$13 45.64,35.75 arc-35 45.54,35.03 42.41,28.57 arc27 42.29,28.04 42.36,25.04 arc6 42.37,24.96 42.72,22.29 arc-7 42.72,22.21 42.74,18.23 42.75,16.88 arc13 42.77,16.72 43.17,15.01 arc60 43.38,14.79 v44.44,14.46 44.88,14.86 arc14 44.92,14.91 47.64,18.9 arc-56 47.73,18.95 47.83,18.95 IC1.1 | A2.5.PB1 43.95,8.77 arc91 42.4,8.24 41.92,7.25 arc-54 41.11,6.62 25.61,3.7 arc-9 25.42,3.68 19.8,3.57 18.78,3.57 arc-19 18.68,3.58 17.89,3.85 arc3 17.88,3.85 v12.24,5.41
  BOTTOM 0.203: U$2.P$22 23.56,44.24 arc-19 23.94,44.37 26.41,44.77 arc-9 26.67,44.79 29.21,44.8 36.83,44.8 arc-9 37.09,44.77 39.56,44.37 arc-62 40.51,43.56 40.76,42.8 arc100 42.48,42.12 U$2.P$13 | A2.5.PB1 v44.44,14.46 | A3.5.PB1 v12.24,5.41
VCC  (via drill 0.4 pad 0.7)
  TOP 0.203: SW4.O 4.8,42.64 4.8,42.54 arc42 4.83,42.47 20.56,25.24 arc3 20.58,25.22 20.69,25.11 21.01,24.79 21.03,24.77 arc44 21.52,24.57 22.16,24.56 arc-44 22.37,24.47 22.82,24.02 arc-44 22.91,23.81 22.91,23.17 arc44 23.12,22.68 23.23,22.57 23.55,22.25 23.57,22.23 arc6 23.62,22.18 25.25,20.86 arc16 25.51,20.71 28.99,19.24 arc45 29.5,19.24 29.84,19.38 arc67 29.9,19.47 29.9,19.57 R4.5 30.2,19.57 30.2,19.47 arc180 30.7,19.47 30.7,19.57 R4.6 31,19.57 31,19.47 arc180 31.5,19.47 31.5,19.57 R4.7 31.8,19.57 31.8,19.47 arc180 32.3,19.47 32.3,19.57 R4.8 32.6,19.7 32.7,19.7 v33.26,19.7
  BOTTOM 0.203: v33.26,19.7 35.21,8.69 arc20 35.43,8.06 38.16,3.34 38.16,3.24 U1.5V
VCC_OFF
  TOP 0.203: Q2.1 14.88,18.04 14.98,18.04 arc13 15.01,18.05 24.8,20.33 arc-36 25.45,20.28 28.83,18.86 arc20 29.19,18.78 30.41,18.71 arc3 30.45,18.71 32.05,18.71 arc16 32.26,18.74 33.43,19.07 arc28 33.71,19.23 36.84,22.25 arc-44 37.34,22.45 37.98,22.45 arc-10 38.1,22.44 38.24,22.41 arc10 38.29,22.41 38.92,22.41 arc80 39.23,22.66 39.9,26.34 arc6 39.9,26.39 40.57,35.47 arc3 40.58,35.54 40.7,43.2 arc-8 40.72,43.36 41.72,49.93 41.72,50.03 U1.D8

## Text on the board
bNames: ATTiny Fuse Reset with 12V / / Charge Pump Programmer | TAMI.org.il / / V001 05/2015
Name: |&lt; digital 13-8&gt;| | |&lt; digital 7-2 &gt;| | gnd | TX | RX | HV | ISP | |&lt;8 pin&gt;| | |&lt;--14 pin--&gt;| | 5V | 3.3V | TAMI ATtiny / / HV / ISP / / Programmer | test | load | |&lt;8 pin&gt;| | |&lt;--14 pin--&gt;| | PB0 | PB1 | PB2 | PB3 | ISP | PB4 | PB5 | ATTami | HV | H.B. | prog | ERR | ATTami | rst | 3v3 | 5V | -GND- | VIN | |&lt; analog 0-5 &gt;|